# Altium PCB DE-061116.PcbDoc
Units mm, origin at the board's own origin, x right, y up, seen from the top; angles counter-clockwise.
Board outline 60 x 50 mm, 2 copper layers (Top Layer, Bottom Layer); 30 components, 19 nets, 76 pads, 19 vias.
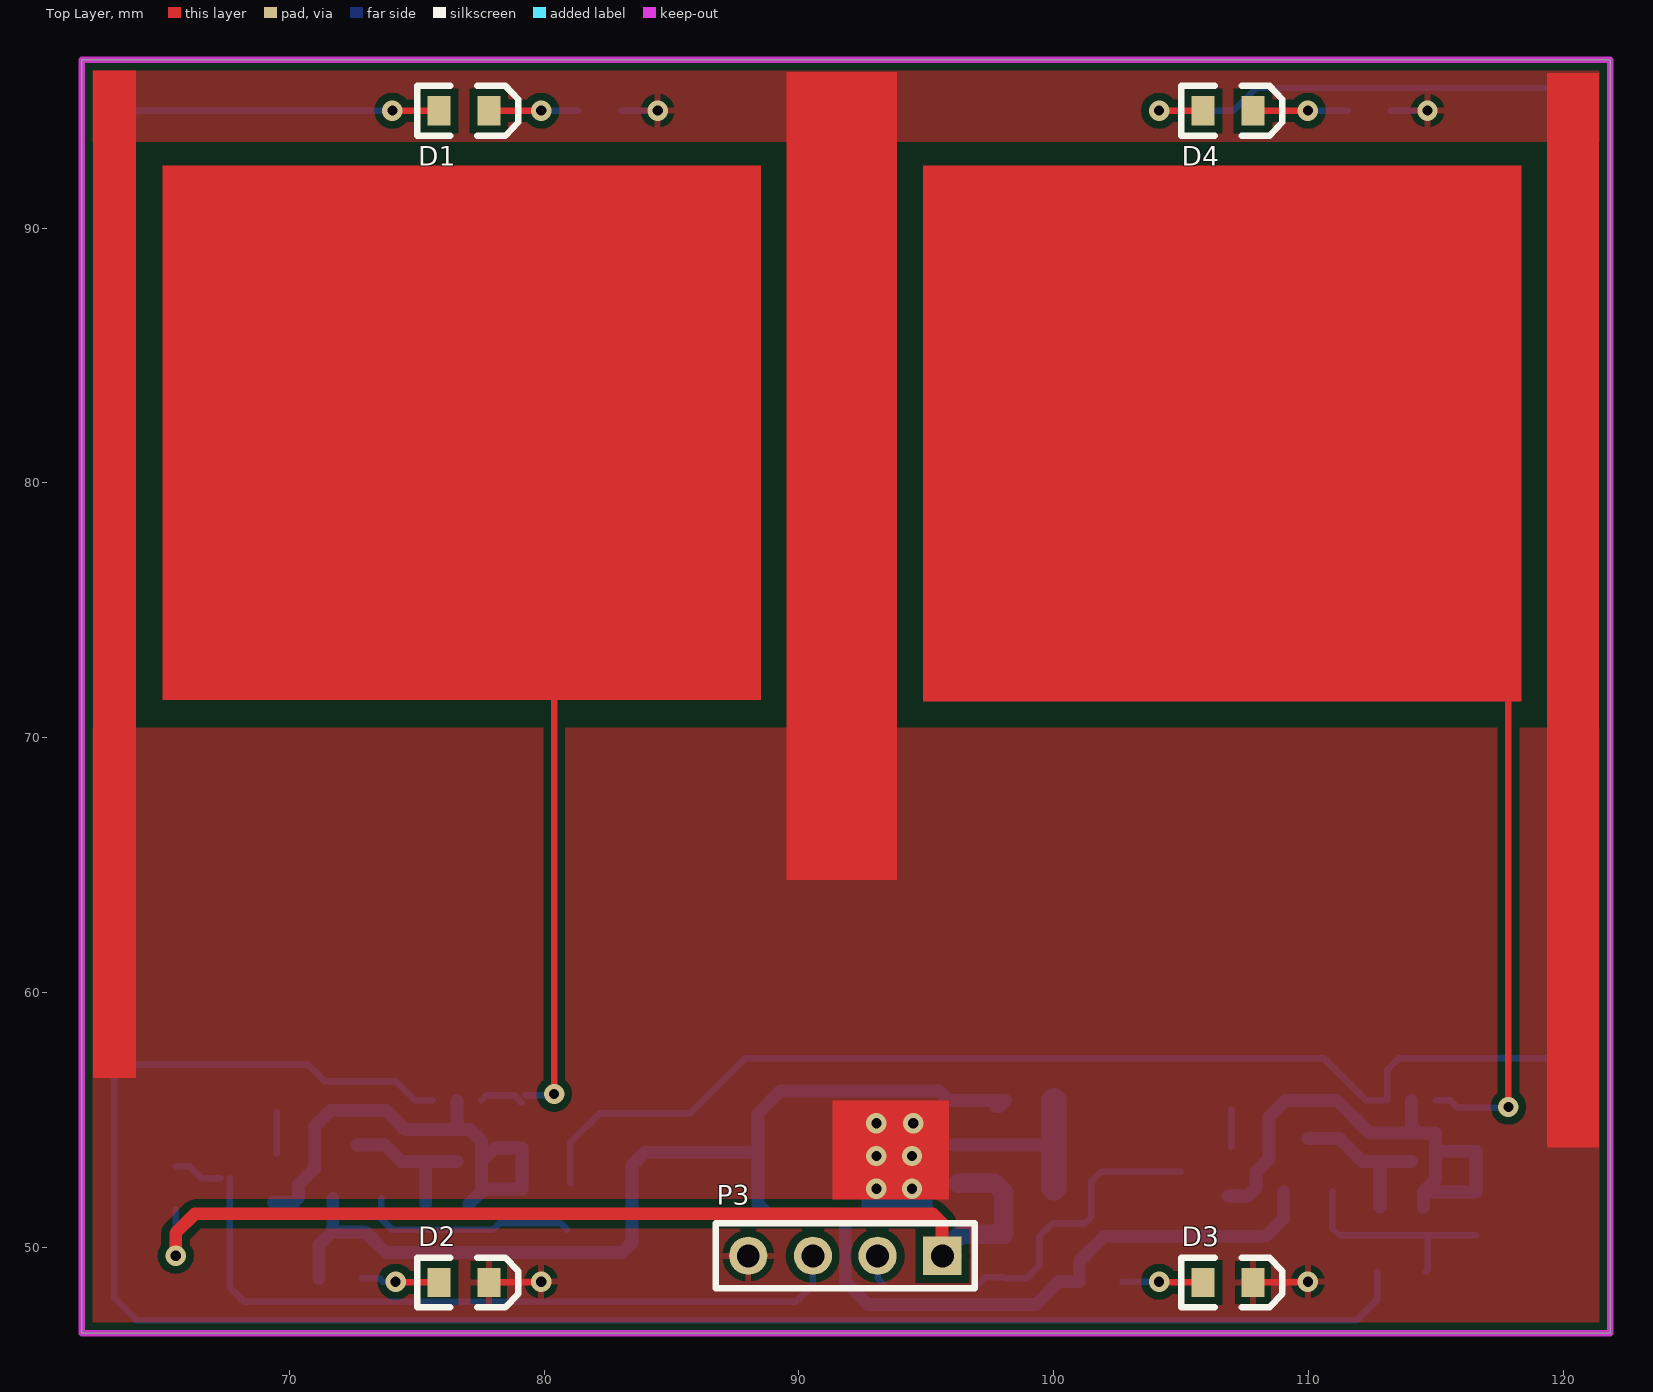
[diagram p0: Top Layer view]
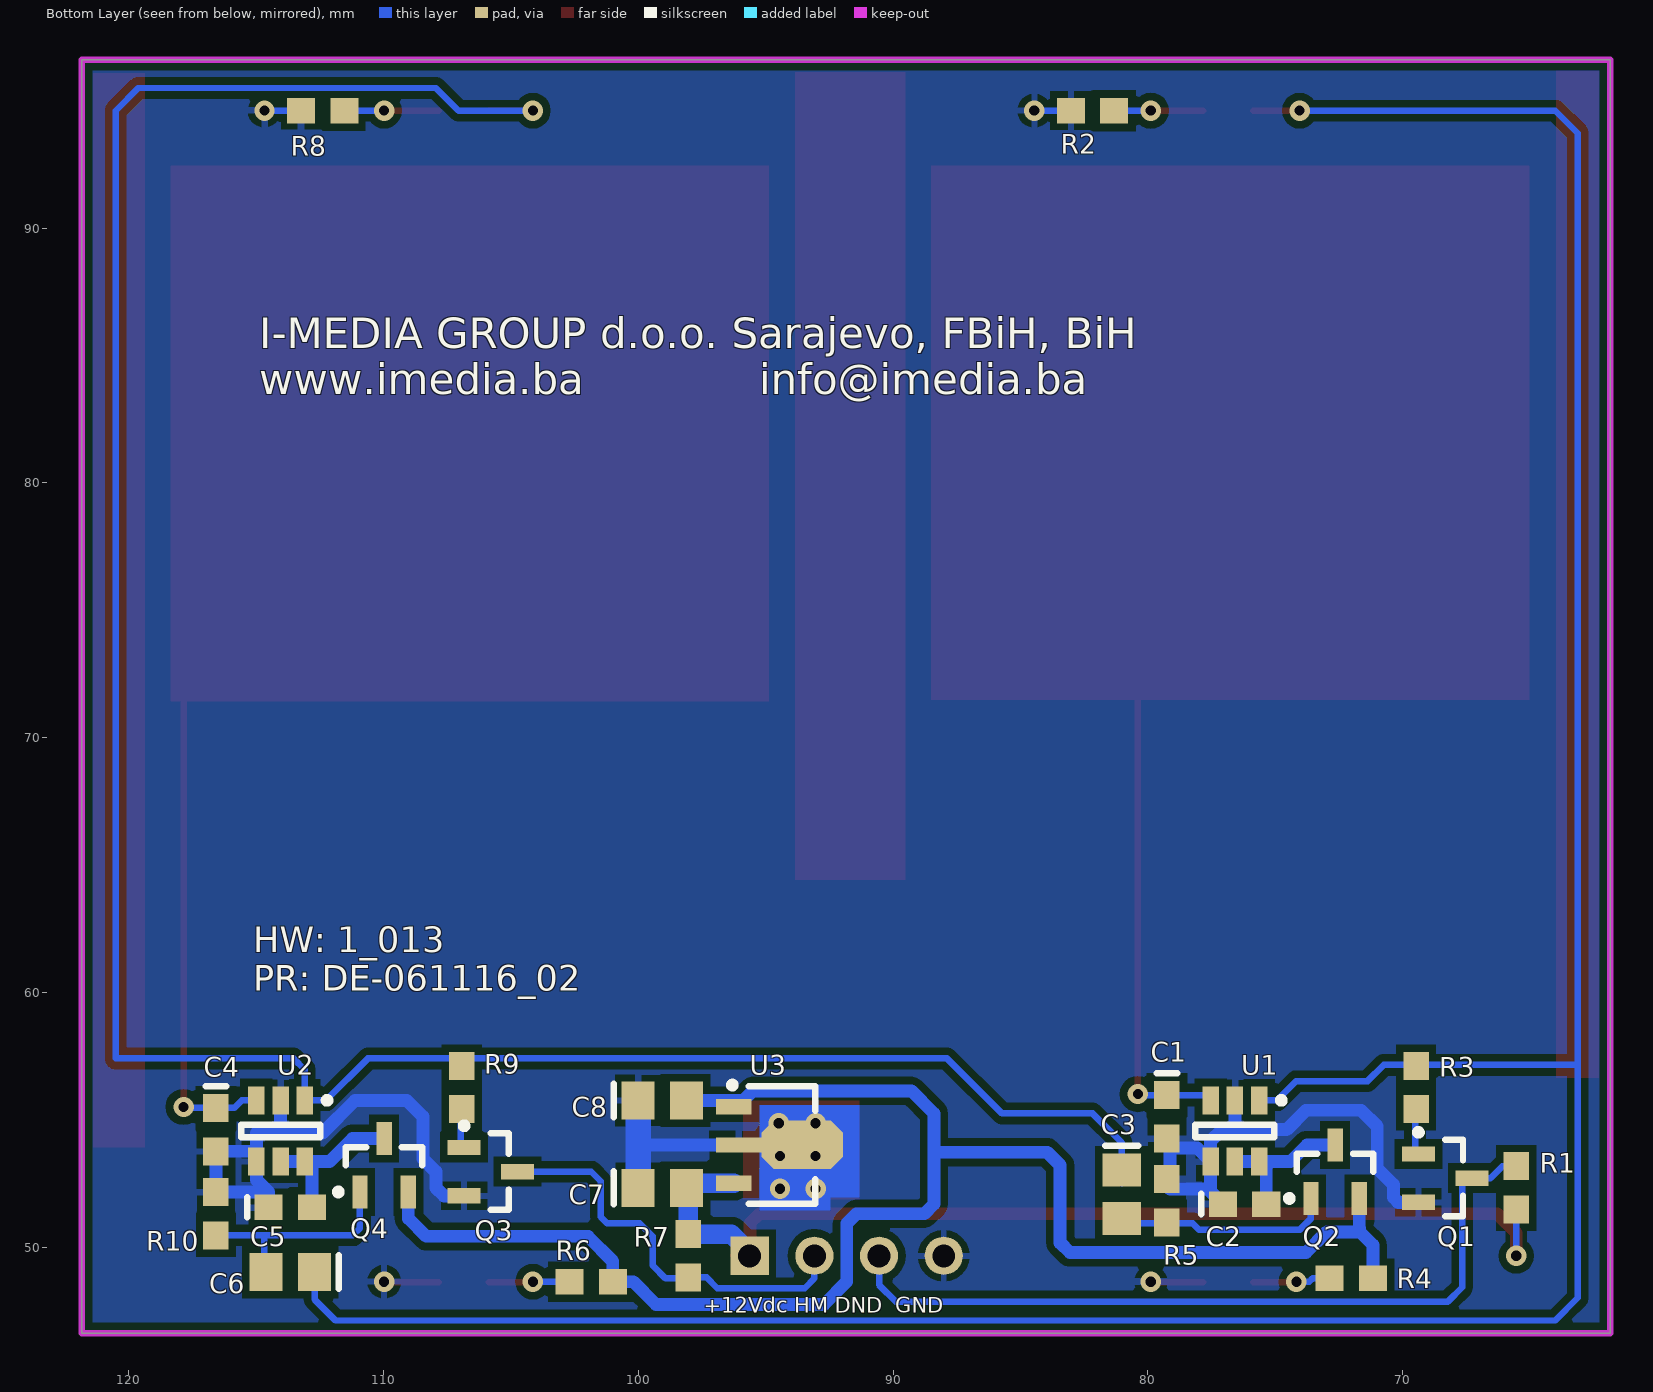
[diagram p1: Bottom Layer view, seen from below]

## Layer stack, top to bottom
Top Solder: solder mask 0.0102, Solder Resist, Dk 3.5
Top Layer: signal copper 0.0356
Dielectric 1: dielectric 0.32, FR-4, Dk 4.8
Bottom Layer: signal copper 0.0356
Bottom Solder: solder mask 0.0102, Solder Resist, Dk 3.5

## Board outline
61.849,46.609 61.849,96.609 121.849,96.609 121.849,46.609

## Design rules (kind name [scope] priority, off if disabled: settings)
Clearance [All] p1: gap=0.254 except(0.3: Arc-Poly Track-Poly SMDPad-Poly THPad-Poly Via-Poly Fill-Poly Poly-Poly)
PolygonConnect [All] p1: connectstyle=Relief reliefconductorwidth=0.254 reliefentries=4 polygonreliefangle="90 Angle" airgapwidth=0.254
RoutingVias [All] p1: holewidth=0.4 width=0.8 viastyle="Through Hole" minholewidth=0.3 minwidth=0.7 maxholewidth=1 maxwidth=1.5
SolderMaskExpansion [All] p1: expansion=0.102
Width [All] p1: maxlimit=2.54 minlimit=0.254 preferedwidth=0.762
30 further rules are at their usual default settings.

## Components (designator, comment, footprint, x,y, rotation, side; value= is the part's Value field where it differs from the comment)
C1 "10pF" 0603 79.248,55.118 r270 bottom
C2 "100nF" 0603 76.2,51.689 r180 bottom
C3 "10uF" 0805 81.026,52.07 r270 bottom
C4 "10pF" 0603 116.586,54.61 r270 bottom
C5 "100nF" 0603 113.665,51.562 r180 bottom
C6 "10uF" 0805 113.665,49.022 r0 bottom
C7 "10uF" 0805 99.06,52.324 r180 bottom
C8 "10uF" 0805 99.06,55.753 r180 bottom
D1 "LED_DND_RED" 2.0X1.25X1.2 76.849,94.609 r0 top locked
D2 "LED_BACKLIGHT_WHITE" 2.0X1.25X1.2 76.849,48.609 r0 top locked
D3 "LED_BACKLIGHT_WHITE" 2.0X1.25X1.2 106.849,48.609 r0 top locked
D4 "LED_HM_CALL_GREEN" 2.0X1.25X1.2 106.849,94.609 r0 top locked
P3 "CON1" HDR1X4 95.631,49.657 r180 top
Q1 "MMBT2222" SOT23_N 68.326,52.705 r180 bottom
Q2 "AO3401" SOT23_N 72.644,52.959 r90 bottom
Q3 "MMBT2222" SOT23_N 105.791,52.959 r180 bottom
Q4 "AO3401" SOT23_N 109.982,53.213 r90 bottom
R1 "2K2" ERA-0603 65.532,52.324 r90 bottom
R2 "330R" ERA-0603 82.169,94.615 r0 bottom
R3 "470R" ERA-0603 69.469,56.261 r90 bottom
R4 "330R" ERA-0603 72.009,48.768 r0 bottom
R5 "100K" ERA-0603 79.248,51.816 r270 bottom
R6 "330R" ERA-0603 101.854,48.641 r0 bottom
R7 "2K2" ERA-0603 98.044,49.657 r270 bottom
R8 "470R" ERA-0603 112.395,94.615 r0 bottom
R9 "470R" ERA-0603 106.934,56.261 r90 bottom
R10 "100K" ERA-0603 116.586,51.308 r270 bottom
U1 "TTP223-BA6" 6ST1_N 76.581,54.559 r270 bottom
U2 "TTP223-BA6" 6ST1_N 114.046,54.559 r270 bottom
U3 "L78L05ACUTR" SOT-89_N 94.361,54.009 r180 bottom

## Footprints (in the part's own frame and the unit in brackets; to place one, negate y for a bottom-side part, rotate by r counter-clockwise, add the part's x,y. Pads: shape width x height; smd on the part's side, far side on the other; paste and mask are expansions set on the pad)
2.0X1.25X1.2 [mm] "SM LED; 2 Flat Leads"
  rect 0.9x1.15 smd: 1(-0.98,0) 2(0.98,0)
  silkscreen extent -1.83,-0.97 2.13,0.97
6ST1_N [mm] "SOT23, 6-Leads, Body 2.9x1.6mm, Pitch 0.95mm, Lead Span 2.7mm, IPC Medium Density"
  rect 1.1x0.65 smd: 1(-1.2,0.95) 2(-1.2,0) 3(-1.2,-0.95) 4(1.2,-0.95) 5(1.2,0) 6(1.2,0.95)
  silkscreen extent -1.32,-1.55 0.25,1.95, body extent -0.9,-1.55 0.9,1.55, height 1.45
0603 [mm] "Chip Capacitor; Body 1.6 x 0.8 mm (LxW typ)"
  rect 1.1x1 smd: 1(-0.85,0) 2(0.85,0)
  silkscreen extent -1.7,-0.4 -1.7,0.4
0805 [mm] "Chip Capacitor; Body 2.0 x 1.2 mm (LxW typ)"
  rect 1.3x1.5 smd: 1(-0.95,0) 2(0.95,0)
  silkscreen extent -1.9,-0.65 -1.9,0.65
ERA-0603 [mm] "Chip Resistor; Body 1.6 x 0.8 mm (LxW typ)"
  rect 1.1x1 smd: 1(-0.85,0) 2(0.85,0)
HDR1X4 [mm] "Connector; Header; 4 Position"
  rect 1.5x1.5 hole 0.9: 1(0,0)
  round 1.5 hole 0.9: 2(2.54,0) 3(5.08,0) 4(7.62,0)
  silkscreen extent -1.27,-1.27 8.89,1.27
SOT23_N [mm] "SOT23, 3-Leads, Body 2.9x1.3mm, Pitch 0.95mm, Lead Span 2.3mm, IPC Medium Density"
  rect 1.3x0.6 smd: 1(-1.05,0.95) 2(-1.05,-0.95) 3(1.05,0)
  silkscreen extent -1.18,-1.5 0.7,1.92, body extent -0.7,-1.5 0.7,1.5, height 1.1
SOT-89_N [mm] "SOT89, 3-Leads, Body 4.5x2.4 mm, Pitch 1.5mm, Lead Span 4.1mm, IPC Medium Density"
  rect 1.4x0.6 smd: 1(-1.9,1.5) 3(-1.9,-1.5)
  rect 1.8x0.6 smd: 2(-1.7,0)
  oct 3.2x1.9 smd: 2(0.8,0)
  silkscreen extent -2.08,-2.3 1.3,2.47, body extent -1.3,-2.3 1.3,2.3, height 1.6

## Part data
C1 C2 C4 C5: library part C0603, "Ceramic Chip Capacitor - Standard"
C3 C6 C7 C8: library part C0805, "Ceramic Chip Capacitor - Standard"
D1 D2 D3 D4: library part HSMC-C540-F0001, "Top Mount AS AlInGaP Red Oval Lens High Brightness"
P3: library part "Header 4", "Header, 4-Pin"
Q1 Q3: library part BC817, "NPN General-purpose Transistor"
Q2 Q4: library part BSH205, "P-channel Enhancement Mode MOSFET"
R1 R2 R3 R4 R5 R6 R7 R8 R9 R10: library part ERAV, "Metal Film Thermosensitive Chip Resistor, 0.56 Ohm to 10k Ohm Range, 5% Tolerance, 0603 Size, 0.063 W"
U1 U2: library part AT42QT1012, "One-channel Toggle-mode Touch Sensor IC with Power Management Functions, 6-pin SOT23"
U3: "Positive Voltage Regulator, 5V, 4-Pin SOT-89, Tape and Reel"

## Via types
v1: diameter 0.8, hole 0.4, Top Layer to Bottom Layer, 19 vias

## Nets (pads, with @x,y where several pads share a name; then routed paths per layer and width w, separated by ;. In a path a pad name is that pad's centre, name@x,y a point inside that pad or via, vN(x,y) a via of type N, cw(c..) or ccw(c..) an arc to the next point about the centre after c; other vN are vias at no path point)
+5V: C8.2 Q2.2 Q4.2 R4.1 R6.1 U3.1 | length 64.8
  Bottom Layer w0.5: R4.1 71.159,50.077 71.694,50.612 Q2.2 ; 88.392,55.245 88.392,51.689 88.773,51.308 91.44,51.308 91.821,50.927 91.821,48.641 92.714,47.748 99.31,47.748 100.203,48.641 R6.1 101.004,49.442 101.981,50.419 108.331,50.419 109.032,51.12 Q4.2
  Bottom Layer w0.508: 71.694,50.739 71.694,50.599 72.972,50.599 73.787,49.784 83.058,49.784 83.439,50.165 83.439,53.213 83.947,53.721 88.392,53.721 ; 88.392,55.245 89.281,56.134 95.504,56.134 95.885,55.753 C8.2 97.866,55.509 C8.2@97.735,55.509
+12V: C7.2 P3.1 R1.1 R7.1 U3.3 | length 41.7
  Top Layer w0.5: v1(65.532,49.657) 65.532,50.546 66.294,51.308 95.25,51.308 95.62,50.938 95.62,50.176 96.139,49.657 P3.1
  Bottom Layer w0.254: v1(65.532,49.657) R1.1
  Bottom Layer w0.762: P3.1 95.631,49.784 96.354,50.507 R7.1 98.044,52.136 97.671,52.509 U3.3
DND_OUT: P3.3 Q1.3 R1.2 | length 30.8
  Bottom Layer w0.254: R1.2 66.079,53.174 66.548,52.705 Q1.3 ; Q1.3@67.657,52.705 67.657,48.421 68.218,47.86 89.897,47.86 90.551,48.514 P3.3
HM_CALL: P3.2 Q3.3 R7.2 | length 16.4
  Bottom Layer w0.254: P3.2 93.091,48.768 93.472,48.387 96.901,48.387 97.321,48.807 R7.2 98.083,48.768 98.933,48.768 99.441,49.276 99.441,50.419 99.949,50.927 101.219,50.927 101.473,51.181 101.473,52.578 101.854,52.959 Q3.3 Q3.3@104.995,52.959
LED_DND: C6.1 D1.1 R3.2 U1.1 | length 123.3
  Top Layer w0.254: v1(74.041,94.615) 74.047,94.609 D1.1
  Bottom Layer w0.254: 63.119,57.15 70.739,57.15 71.374,56.515 74.168,56.515 74.924,55.759 U1.1 ; v1(74.041,94.615) 64.008,94.615 63.119,93.726 63.119,48.006 64.008,47.117 111.887,47.117 112.715,47.945 C6.1
LED_HM_CALL: C3.1 D4.1 R9.2 U2.1 | length 100.6
  Top Layer w0.254: v1(104.14,94.615) 104.146,94.609 D4.1
  Bottom Layer w0.254: C3.1@81.026,52.512 81.026,54.102 82.169,55.245 85.725,55.245 87.884,57.404 110.617,57.404 112.262,55.759 U2.1 113.096,56.962 113.538,57.404 120.523,57.404 120.523,94.615 119.634,95.504 107.95,95.504 107.061,94.615 v1(104.14,94.615)
NetC1_1: C1.1 U1.3 | length 18.6
  Top Layer w0.254: v1(80.391,56.007) 80.391,71.653
  Bottom Layer w0.254: U1.3 77.74,55.968 78.812,55.968 C1.1@79.121,55.659 ; C1.1 80.352,55.968 v1(80.391,56.007)
NetC2_2: C2.2 Q2.3 U1.5 U1.6 | length 5.9
  Bottom Layer w0.5: Q2.3 73.753,54.009 74.403,53.359 75.184,53.359 ; C2.2 75.35,53.193 75.184,53.359 ; U1.5 U1.6 75.184,53.359
NetC3_2: C3.2 Q2.1 R5.2 | length 8.5
  Bottom Layer w0.254: Q2.1 73.594,51.12 74.041,50.673 77.978,50.673 78.232,50.927 80.657,50.927 C3.2@80.899,50.685
NetC4_1: C4.1 U2.3 | length 19.2
  Top Layer w0.254: v1(117.856,55.499) 117.856,71.704
  Bottom Layer w0.254: U2.3 115.564,55.759 115.863,55.46 C4.1 117.817,55.46 v1(117.856,55.499)
NetC5_2: C5.2 Q4.3 U2.5 U2.6 | length 6.3
  Bottom Layer w0.508: Q4.3 111.218,54.263 112.122,53.359 U2.6@112.776,53.359 ; C5.2 112.815,53.32 U2.6@112.776,53.359 ; U2.5 U2.6 U2.6@112.776,53.359
NetC6_2: C6.2 Q4.1 R10.2 | length 8.7
  Bottom Layer w0.254: Q4.1 110.932,50.739 111.213,50.458 114.681,50.458 ; C6.2 114.681,49.088 114.681,50.458 ; R10.2 114.681,50.458
NetD1_2: D1.2 R2.1 | length 3.5
  Top Layer w0.254: D1.2 79.877,94.609 v1(79.883,94.615)
  Bottom Layer w0.254: v1(79.883,94.615) R2.1
NetD2_1: D2.1 R4.2 | length 3.1
  Top Layer w0.254: v1(74.168,48.641) 74.2,48.609 D2.1
  Bottom Layer w0.254: R4.2 73.533,48.768 73.66,48.641 v1(74.168,48.641)
NetD3_1: D3.1 R6.2 | length 3.2
  Top Layer w0.254: v1(104.14,48.641) 104.172,48.609 D3.1
  Bottom Layer w0.254: R6.2 v1(104.14,48.641)
NetD4_2: D4.2 R8.1 | length 3.7
  Top Layer w0.254: D4.2 109.976,94.609 v1(109.982,94.615)
  Bottom Layer w0.254: v1(109.982,94.615) R8.1
NetQ1_1: Q1.1 R3.1 | length 1.6
  Bottom Layer w0.254: Q1.1@69.508,53.655 R3.1@69.508,55.284
NetQ3_1: Q3.1 R9.1 | length 1.5
  Bottom Layer w0.254: Q3.1@106.973,53.914 R9.1@106.973,55.411
VSS: C1.2 C2.1 C4.2 C5.1 C7.1 C8.1 D2.2 D3.2 P3.4 Q1.2 Q3.2 R2.2 R5.1 R8.2 R10.1 U1.2 U1.4 U2.2 U2.4 U3.2 | length 55.7
  Top Layer w0.254: D2.2 79.851,48.609 v1(79.883,48.641) ; D3.2 109.95,48.609 v1(109.982,48.641)
  Bottom Layer w0.254: R2.2 v1(84.455,94.615) ; 99.976,54.009 100.01,53.975 ; C8.1 C8.1@100.01,55.757 ; R8.2 v1(114.681,94.615)
  Bottom Layer w0.508: Q1.2 70.17,51.755 70.358,51.943 70.358,52.451 70.993,53.086 70.993,54.737 71.628,55.372 73.787,55.372 74.549,54.61 76.454,54.61 ; U1.2 76.581,54.737 76.454,54.61 ; C2.1 77.531,52.17 U1.4 ; 77.646,52.285 79.121,52.285 79.121,53.887 78.059,53.887 U1.4 ; U3.2@96.061,54.009 99.976,54.009 ; Q3.2 107.635,52.009 107.95,52.324 107.95,52.959 108.458,53.467 108.458,55.118 109.093,55.753 111.125,55.753 112.395,54.483 114.3,54.483 ; U2.2 114.046,54.737 114.3,54.483 ; C5.1 114.515,52.158 114.996,52.639 U2.4 U2.4@114.996,53.721 ; 114.808,52.158 R10.1 C4.2 115.035,53.76 U2.4@114.996,53.721 ; 76.454,54.61 77.089,54.61 77.531,54.168 U1.4 ; 114.3,54.483 114.996,54.483 U2.4@114.996,53.721
  Bottom Layer w1: C7.1 100.01,53.975 C8.1
  other v1: 93.043,52.289 94.44,52.289 93.043,53.576 94.44,53.576 93.043,54.864 94.488,54.864

## Polygon pours and split planes (outlines as drawn)
VSS on Bottom Layer "VSS" (solid, remove dead copper, pour order 0): 89.445,55.499 95.123,55.499 95.25,55.372 95.25,51.435 94.742,50.927 92.964,50.927 91.948,51.943 90.17,51.943 89.027,51.943 88.9,52.07 88.9,54.737 88.9,54.954
VSS on Bottom Layer "VSS" (solid, remove dead copper, pour order 2): 61.976,96.609 121.793,96.609 121.793,46.609 61.976,46.609 61.849,46.736 61.849,96.52
VSS on Top Layer "VSS" (solid, remove dead copper, pour order 8): 89.51,65.253 89.51,56.49 89.764,56.236 93.828,56.236 93.853,56.261 93.853,65.253 89.51,65.253
VSS on Top Layer "VSS" (solid, remove dead copper, pour order 4): 61.849,46.609 121.793,46.609 121.793,54.173 121.793,70.383 61.849,70.383 61.849,46.736
VSS on Top Layer "VSS" (solid, remove dead copper, pour order 6): 62.284,96.19 121.412,96.19 121.412,93.396 62.281,93.396 62.281,96.186 62.284,96.19

## Keep-outs
Keep-Out Layer:
  the board outline again, w0.254

## Other copper
Top Layer:
  rectangle net NetC4_1: 94.869,71.425 118.364,92.456
  rectangle net NetC1_1: 65.024,71.476 88.519,92.456
  rectangle net VSS: 91.313,51.867 95.885,55.753
  rectangle net VSS: 89.51,64.414 93.853,96.139
  rectangle net VSS: 119.38,53.906 121.414,96.088
  rectangle net VSS: 62.284,56.642 63.983,96.19
Bottom Layer:
  rectangle net VSS: 91.313,51.943 95.25,55.575
  rectangle net VSS: 92.455,51.435 95.25,52.805

## Silkscreen, mask and mechanical layers (free items; w line width, h text height)
Bottom Overlay:
  text "I-MEDIA GROUP d.o.o. Sarajevo, FBiH, BiH / www.imedia.ba             info@imedia.ba" at 114.884,83.49 h1.2
  text "HW: 1_013 / PR: DE-061116_02" at 115.113,60.071 h1
  text "+12Vdc HM DND  GND" at 97.434,47.422 h0.6

## Dimensions
61.849,96.609 to 121.849,96.609 on Mechanical 13
121.849,96.609 to 121.849,46.609 on Mechanical 13